# EAGLE board Amplifiers (EAGLE 9.6.2)

No outline drawn. Coordinates in mm, seen from the top.
Copper layers (1*16): Top 0.035mm / dielectric 1.5mm / Bottom 0.035mm
Design rules "default": minimum track width 6mil, minimum drill 0.35mm, track to track 6mil, track to pad 6mil, pad to pad 6mil, via to via 6mil, smd to smd 6mil, copper to edge 40mil, drill to drill 6mil, minimum pad ring 10mil, minimum via ring 8mil, stop-mask expansion 4mil, vias tented up to drill 0mil, thermal gap 10mil

## Footprints (pad centres in the part's own frame; a part is rotated, then mirrored left to right if it is on the bottom)
C2.5-2 = drill 0.813 pad 1.6 octagon: 1 -1.27,0; 2 1.27,0
1X04 = drill 1.016 long: 1 -3.81,0; 2 -1.27,0; 3 1.27,0; 4 3.81,0
1X03 = drill 1.016 long: 1 -2.54,0; 2 0,0; 3 2.54,0
0204/5 = drill 0.813 octagon: 1 -2.54,0; 2 2.54,0
DIP794W45P254L959H508Q8 = drill 0.78 pad 1.13 square: 1 -3.97,3.81 | drill 0.78 pad 1.13: 2 -3.97,1.27; 3 -3.97,-1.27; 4 -3.97,-3.81; 5 3.97,-3.81; 6 3.97,-1.27; 7 3.97,1.27; 8 3.97,3.81

## Placement (x,y rotation side)
C1  [C2.5-2]  38.1,38.1 0 top
C2  [C2.5-2]  43.18,38.1 0 top
C3  [C2.5-2]  7.62,16.51 0 top
C4  [C2.5-2]  7.62,11.43 0 top
C5  [C2.5-2]  7.62,6.35 0 top
JP2  [1X04]  11.43,-5.08 0 top
JP3  [1X03]  10.16,1.27 0 top
R1  [0204/5]  49.53,38.1 0 top
R2  [0204/5]  39.37,33.02 0 top
R3  [0204/5]  46.99,33.02 0 top
R4  [0204/5]  39.37,29.21 0 top
R5  [0204/5]  46.99,29.21 0 top
R6  [0204/5]  39.37,25.4 0 top
R7  [0204/5]  46.99,25.4 0 top
R8  [0204/5]  39.37,21.59 0 top
U1  TL082CP  [DIP794W45P254L959H508Q8]  30.48,27.94 0 top
U2  TL081CP  [DIP794W45P254L959H508Q8]  20.32,27.94 0 top
U3  TL081CP  [DIP794W45P254L959H508Q8]  10.16,27.94 0 top

## Library data of the parts
C1-C5 = capacitor-wima
JP2 JP3 = pinhead
R1-R8 = rcl; SPICEPREFIX: R
U1 = TL082CP; AVAILABILITY: In Stock; CHECK_PRICES: https://www.snapeda.com/parts/TL082CP/Texas+Instruments/view-part/?ref=eda; DESCRIPTION: Dual, 30-V, 3-MHz, 13-V/µs slew rate, In to V+, JFET-input op amp; MF: Texas Instruments; MP: TL082CP; PACKAGE: PDIP-8 Texas; PRICE: None; PURCHASE-URL: https://www.snapeda.com/api/url_track_click_mouser/?unipart_id=854431&manufacturer=Texas Instruments&part_name=TL082CP&search_term=tl082; SNAPEDA_LINK: https://www.snapeda.com/parts/TL082CP/Texas+Instruments/view-part/?ref=snap
U2 U3 = TL081CP; AVAILABILITY: In Stock; CHECK_PRICES: https://www.snapeda.com/parts/TL081CP/Texas+Instruments/view-part/?ref=eda; DESCRIPTION: Single, 30-V, 3-MHz, 13-V/µs slew rate, In to V+, JFET-input op amp; MF: Texas Instruments; MP: TL081CP; PACKAGE: PDIP-8 Texas; PRICE: None; PURCHASE-URL: https://www.snapeda.com/api/url_track_click_mouser/?unipart_id=51607&manufacturer=Texas Instruments&part_name=TL081CP&search_term=tl081; SNAPEDA_LINK: https://www.snapeda.com/parts/TL081CP/Texas+Instruments/view-part/?ref=snap

## Nets
1IN-: R2.2 R3.1 U1.5
1OUT: R1.1 R3.2 U1.1
2IN-: R1.2 R4.1 U1.6
3IN+: R5.1 R6.2 U2.3
4IN-: C1.2 C2.1 R8.1 U3.2
AIN+: JP3.2 U1.2
AIN-: JP3.3 U1.3
AOUT: C2.2 JP2.4 R8.2 U3.6
GND: C3.1 C4.1 C5.1 JP2.3 R2.1 R6.1
N$7: U3.4
N$8: U3.7
N$9: C1.1 R7.2
N$10: U2.4
N$11: U2.7
N$14: U1.8
N$15: U1.4
REFOUT: JP3.1 U2.2 U2.6 U3.3
VDD: C3.2 C4.2 C5.2 JP2.1
VOD: R4.2 R7.1 U1.7
VREF: JP2.2 R5.2

## Tracks (layer width: path | path; a pad name or v marks a point on that pad's centre or on a via)
1IN-  (2 unrouted)
1OUT  (2 unrouted)
2IN-  (2 unrouted)
3IN+  (2 unrouted)
4IN-  (3 unrouted)
AIN+  (1 unrouted)
AIN-  (1 unrouted)
AOUT  (3 unrouted)
GND  (5 unrouted)
N$9  (1 unrouted)
REFOUT  (3 unrouted)
VDD  (3 unrouted)
VOD  (2 unrouted)
VREF  (1 unrouted)